# Altium PCB PCB1.PcbDoc (part 1 of 3)
Units mm, origin at the board's own origin, x right, y up, seen from the top; angles counter-clockwise.
Board outline 55.24 x 34.04 mm, 2 copper layers (Top Layer, Bottom Layer), stack 3.048 mm thick; 216 components, 8 nets, 576 pads, 0 vias.
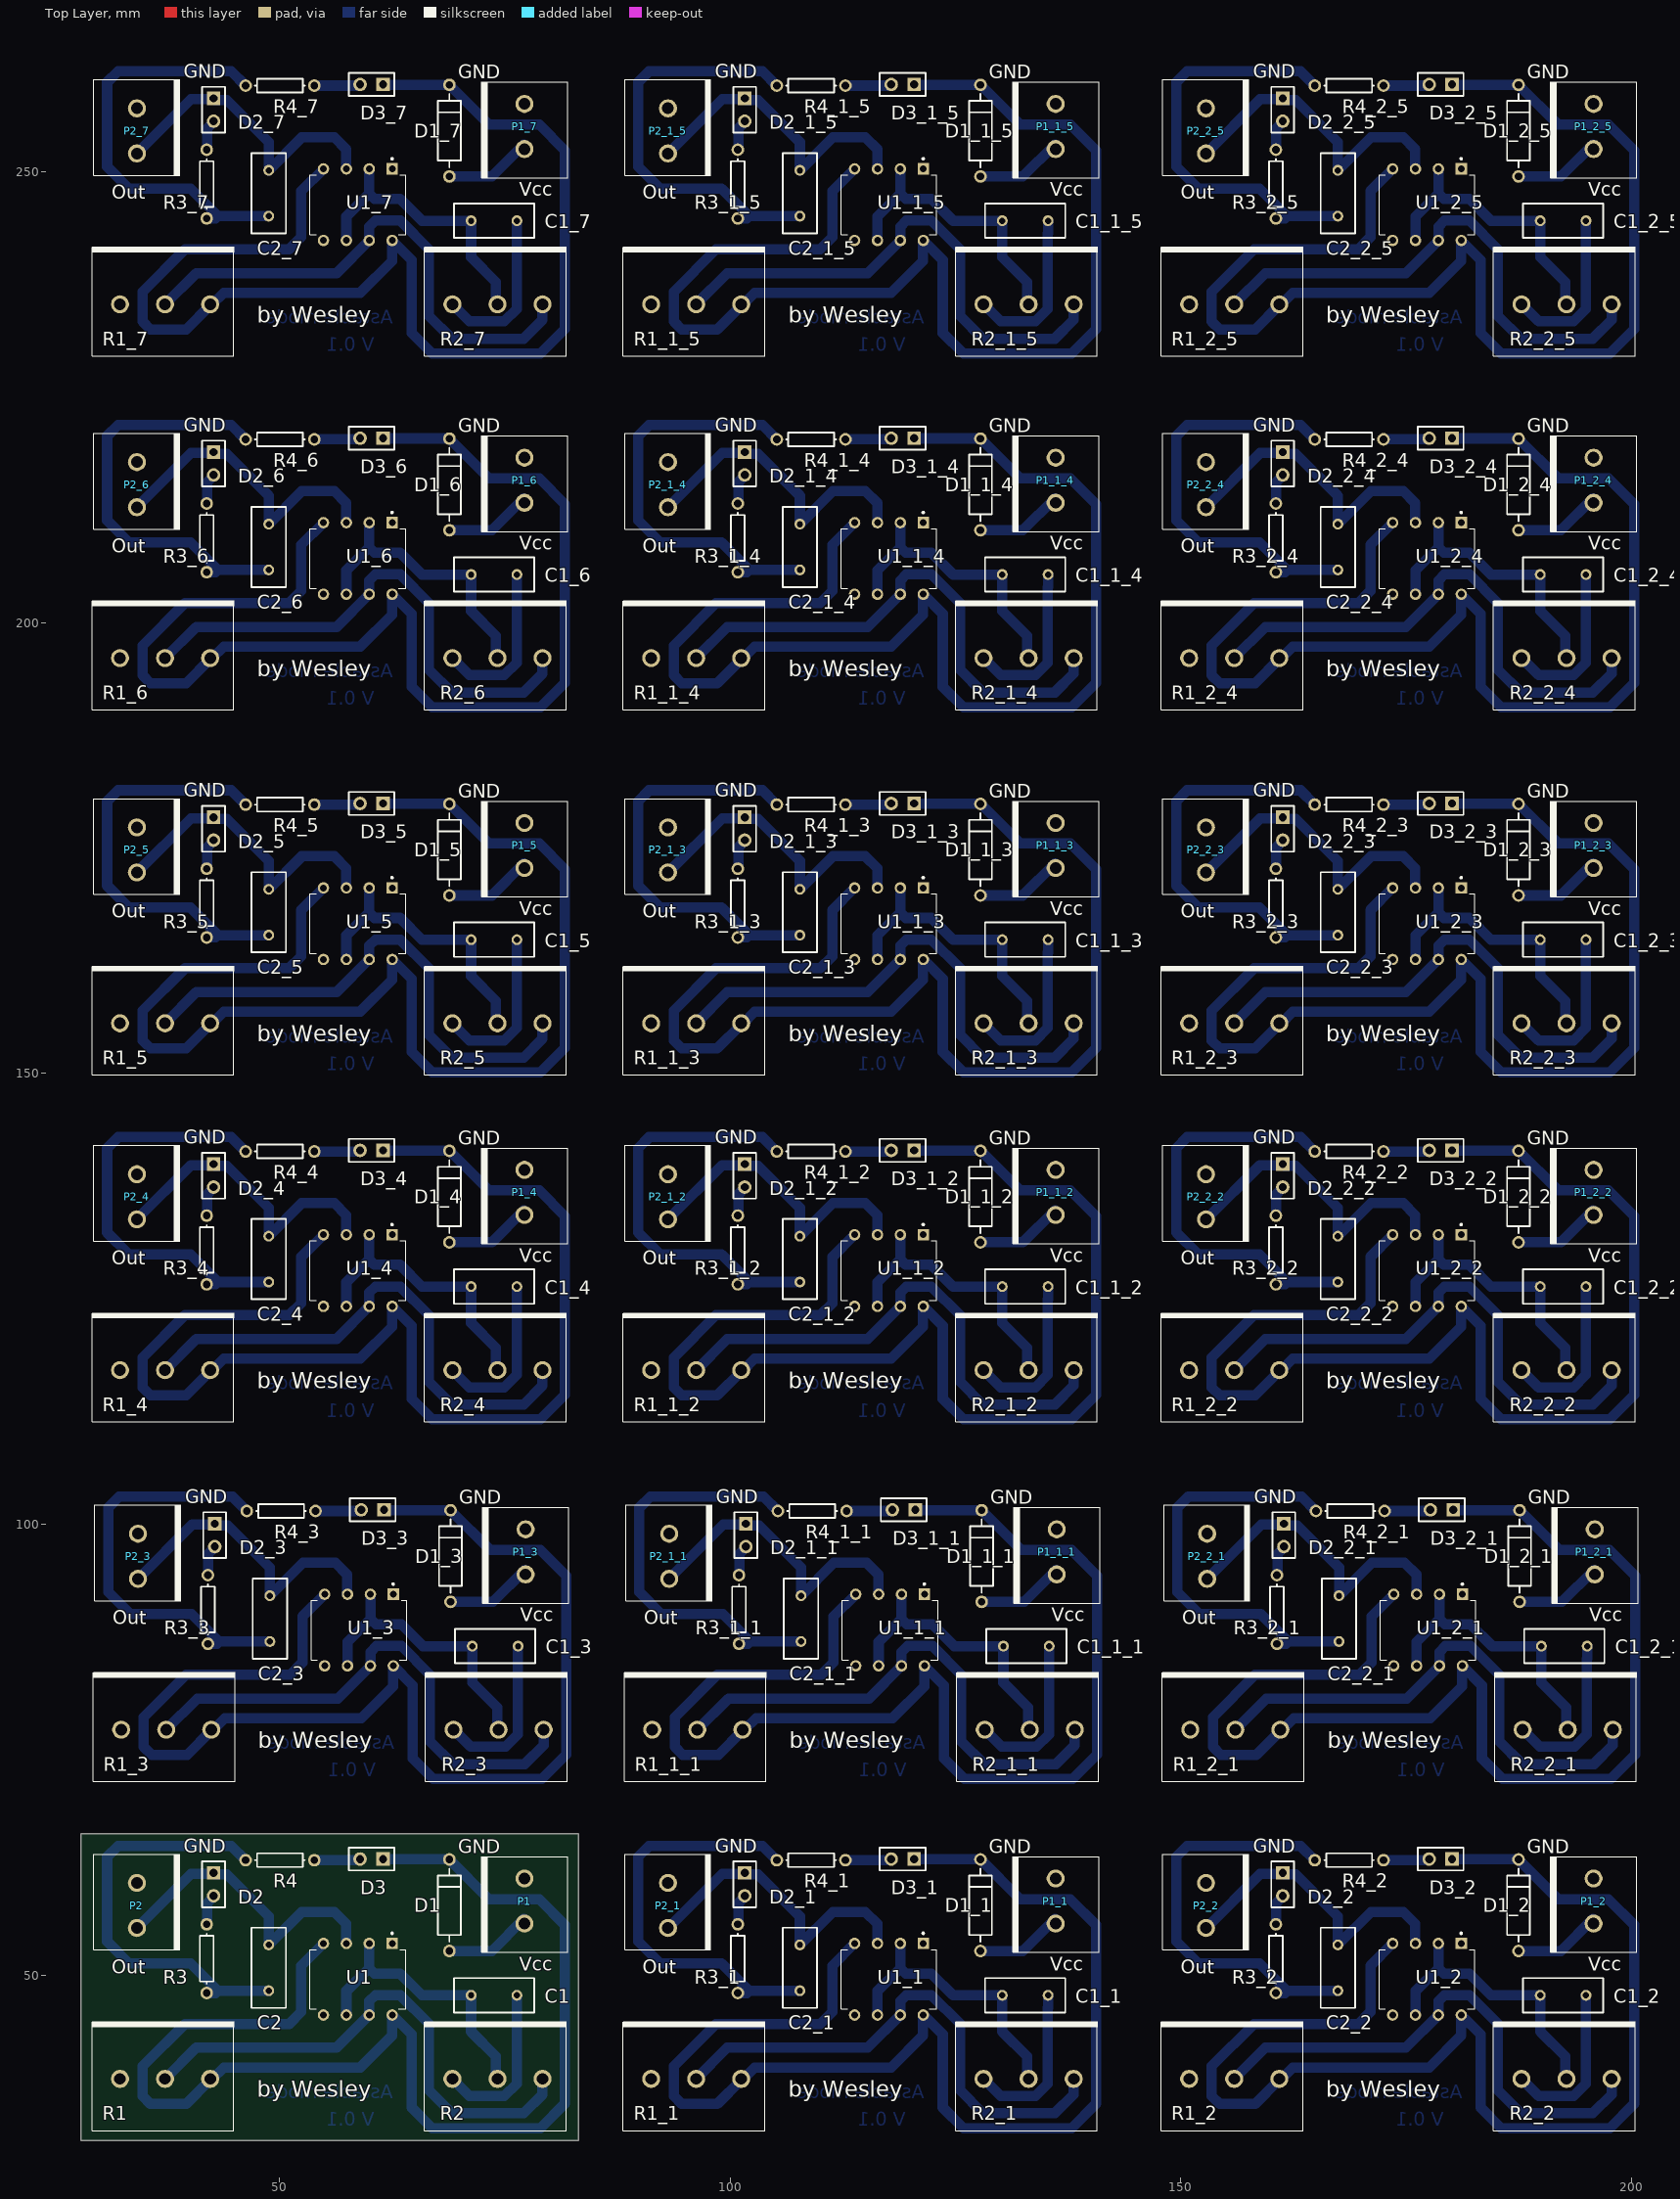
[diagram p0: Top Layer view]
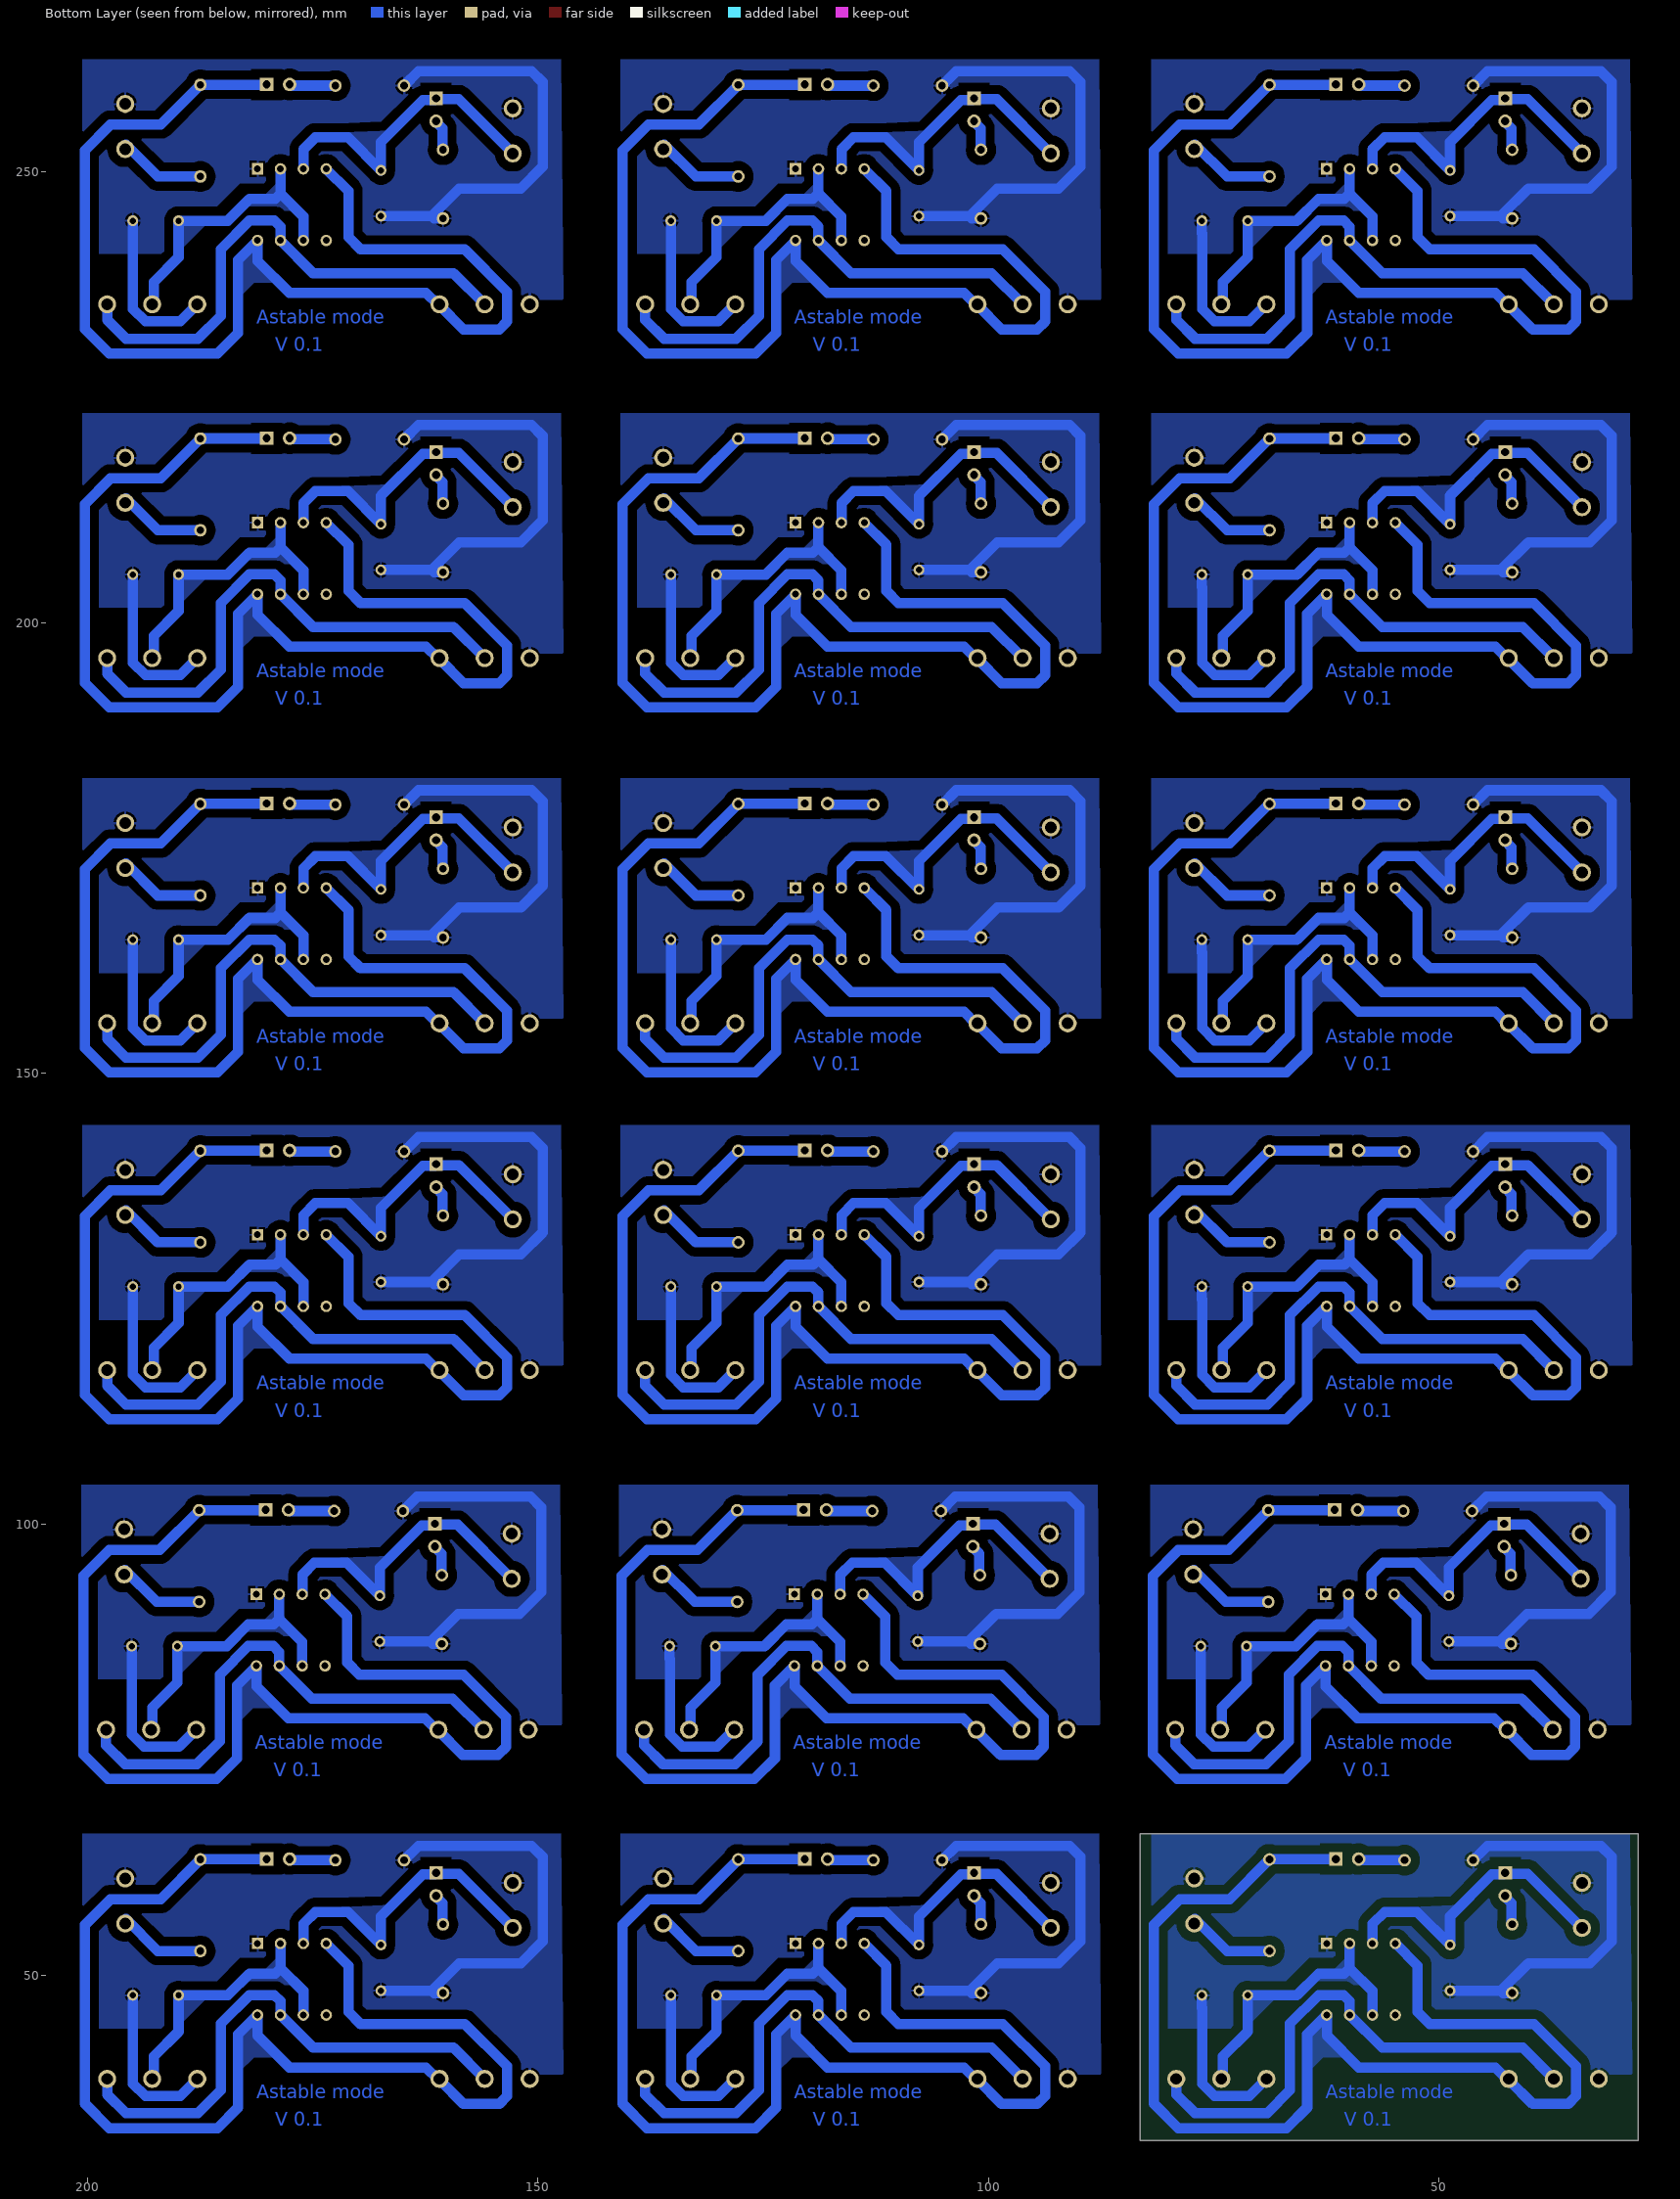
[diagram p1: Bottom Layer view, seen from below]

## Layer stack, top to bottom
Top Solder: solder mask 1.016, Solder Resist, Dk 3.5
Top Layer: signal copper 1.016
Dielectric 1: dielectric 1.016, FR-4, Dk 4.8
Bottom Layer: signal copper 1.016
Bottom Solder: solder mask 1.016, Solder Resist, Dk 3.5

## Board outline
27.94,31.623 83.185,31.623 83.185,65.659 27.94,65.659

## Design rules (kind name [scope] priority, off if disabled: settings)
Clearance [All] p1: gap=1.016 ignorepadtopadclearanceinfootprint=FALSE except(0.254: Arc-Arc Arc-Track Arc-THPad Arc-Hole Track-Track Track-THPad Track-Hole SMDPad-THPad SMDPad-Hole THPad-THPad THPad-Hole Via-Hole)
PolygonConnect [All] p1: connectstyle=Relief reliefconductorwidth=0.254 reliefentries=4 polygonreliefangle="90 Angle" airgapwidth=0.254
RoutingVias [All] p1: holewidth=0.711 width=1.27 viastyle="Through Hole" minholewidth=0.711 minwidth=1.27 maxholewidth=0.711 maxwidth=1.27
SolderMaskExpansion [All] p1: expansion=0.102
Width [All] p1: maxlimit=1.27 minlimit=1.016 preferedwidth=1.143 minimp=50.000000 maximp=50.000000 favimp=50.000000
30 further rules are at their usual default settings.

## Classes and differential pairs
component class Sheet1: C1 C2 D1 D2 D3 P1 P2 R1 R2 R3 R4 U1

## Components (designator, comment, footprint, x,y, rotation, side; value= is the part's Value field where it differs from the comment)
C1 "Cap" RAD-0.2 73.787,47.752 r180 top value=22uF
C1_1 "Cap" RAD-0.2 132.715,47.752 r180 top value=22uF (schematic designator C1)
C1_1_1 "Cap" RAD-0.2 132.842,86.487 r180 top value=22uF (schematic designator C1)
C1_1_2 "Cap" RAD-0.2 132.715,126.365 r180 top value=22uF (schematic designator C1)
C1_1_3 "Cap" RAD-0.2 132.715,164.846 r180 top value=22uF (schematic designator C1)
C1_1_4 "Cap" RAD-0.2 132.715,205.359 r180 top value=22uF (schematic designator C1)
C1_1_5 "Cap" RAD-0.2 132.715,244.602 r180 top value=22uF (schematic designator C1)
C1_2 "Cap" RAD-0.2 192.405,47.752 r180 top value=22uF (schematic designator C1)
C1_2_1 "Cap" RAD-0.2 192.532,86.487 r180 top value=22uF (schematic designator C1)
C1_2_2 "Cap" RAD-0.2 192.405,126.365 r180 top value=22uF (schematic designator C1)
C1_2_3 "Cap" RAD-0.2 192.405,164.846 r180 top value=22uF (schematic designator C1)
C1_2_4 "Cap" RAD-0.2 192.405,205.359 r180 top value=22uF (schematic designator C1)
C1_2_5 "Cap" RAD-0.2 192.405,244.602 r180 top value=22uF (schematic designator C1)
C1_3 "Cap" RAD-0.2 73.914,86.487 r180 top value=22uF (schematic designator C1)
C1_4 "Cap" RAD-0.2 73.787,126.365 r180 top value=22uF (schematic designator C1)
C1_5 "Cap" RAD-0.2 73.787,164.846 r180 top value=22uF (schematic designator C1)
C1_6 "Cap" RAD-0.2 73.787,205.359 r180 top value=22uF (schematic designator C1)
C1_7 "Cap" RAD-0.2 73.787,244.602 r180 top value=22uF (schematic designator C1)
C2 "Cap Pol2" RAD-0.2 48.794,50.8 r270 top value=100nF
C2_1 "Cap Pol2" RAD-0.2 107.722,50.8 r270 top value=100nF (schematic designator C2)
C2_1_1 "Cap Pol2" RAD-0.2 107.849,89.535 r270 top value=100nF (schematic designator C2)
C2_1_2 "Cap Pol2" RAD-0.2 107.722,129.413 r270 top value=100nF (schematic designator C2)
C2_1_3 "Cap Pol2" RAD-0.2 107.722,167.894 r270 top value=100nF (schematic designator C2)
C2_1_4 "Cap Pol2" RAD-0.2 107.722,208.407 r270 top value=100nF (schematic designator C2)
C2_1_5 "Cap Pol2" RAD-0.2 107.722,247.65 r270 top value=100nF (schematic designator C2)
C2_2 "Cap Pol2" RAD-0.2 167.412,50.8 r270 top value=100nF (schematic designator C2)
C2_2_1 "Cap Pol2" RAD-0.2 167.539,89.535 r270 top value=100nF (schematic designator C2)
C2_2_2 "Cap Pol2" RAD-0.2 167.412,129.413 r270 top value=100nF (schematic designator C2)
C2_2_3 "Cap Pol2" RAD-0.2 167.412,167.894 r270 top value=100nF (schematic designator C2)
C2_2_4 "Cap Pol2" RAD-0.2 167.412,208.407 r270 top value=100nF (schematic designator C2)
C2_2_5 "Cap Pol2" RAD-0.2 167.412,247.65 r270 top value=100nF (schematic designator C2)
C2_3 "Cap Pol2" RAD-0.2 48.921,89.535 r270 top value=100nF (schematic designator C2)
C2_4 "Cap Pol2" RAD-0.2 48.794,129.413 r270 top value=100nF (schematic designator C2)
C2_5 "Cap Pol2" RAD-0.2 48.794,167.894 r270 top value=100nF (schematic designator C2)
C2_6 "Cap Pol2" RAD-0.2 48.794,208.407 r270 top value=100nF (schematic designator C2)
C2_7 "Cap Pol2" RAD-0.2 48.794,247.65 r270 top value=100nF (schematic designator C2)
D1 "Diode" DIODE-0.4 68.834,57.741 r90 top
D1_1 "Diode" DIODE-0.4 127.762,57.741 r90 top (schematic designator D1)
D1_1_1 "Diode" DIODE-0.4 127.889,96.476 r90 top (schematic designator D1)
D1_1_2 "Diode" DIODE-0.4 127.762,136.354 r90 top (schematic designator D1)
D1_1_3 "Diode" DIODE-0.4 127.762,174.835 r90 top (schematic designator D1)
D1_1_4 "Diode" DIODE-0.4 127.762,215.348 r90 top (schematic designator D1)
D1_1_5 "Diode" DIODE-0.4 127.762,254.591 r90 top (schematic designator D1)
D1_2 "Diode" DIODE-0.4 187.452,57.741 r90 top (schematic designator D1)
D1_2_1 "Diode" DIODE-0.4 187.579,96.476 r90 top (schematic designator D1)
D1_2_2 "Diode" DIODE-0.4 187.452,136.354 r90 top (schematic designator D1)
D1_2_3 "Diode" DIODE-0.4 187.452,174.835 r90 top (schematic designator D1)
D1_2_4 "Diode" DIODE-0.4 187.452,215.348 r90 top (schematic designator D1)
D1_2_5 "Diode" DIODE-0.4 187.452,254.591 r90 top (schematic designator D1)
D1_3 "Diode" DIODE-0.4 68.961,96.476 r90 top (schematic designator D1)
D1_4 "Diode" DIODE-0.4 68.834,136.354 r90 top (schematic designator D1)
D1_5 "Diode" DIODE-0.4 68.834,174.835 r90 top (schematic designator D1)
D1_6 "Diode" DIODE-0.4 68.834,215.348 r90 top (schematic designator D1)
D1_7 "Diode" DIODE-0.4 68.834,254.591 r90 top (schematic designator D1)
D2 "LED0" HDR1X2 42.672,61.331 r270 top
D2_1 "LED0" HDR1X2 101.6,61.331 r270 top (schematic designator D2)
D2_1_1 "LED0" HDR1X2 101.727,100.066 r270 top (schematic designator D2)
D2_1_2 "LED0" HDR1X2 101.6,139.944 r270 top (schematic designator D2)
D2_1_3 "LED0" HDR1X2 101.6,178.425 r270 top (schematic designator D2)
D2_1_4 "LED0" HDR1X2 101.6,218.938 r270 top (schematic designator D2)
D2_1_5 "LED0" HDR1X2 101.6,258.181 r270 top (schematic designator D2)
D2_2 "LED0" HDR1X2 161.29,61.331 r270 top (schematic designator D2)
D2_2_1 "LED0" HDR1X2 161.417,100.066 r270 top (schematic designator D2)
D2_2_2 "LED0" HDR1X2 161.29,139.944 r270 top (schematic designator D2)
D2_2_3 "LED0" HDR1X2 161.29,178.425 r270 top (schematic designator D2)
D2_2_4 "LED0" HDR1X2 161.29,218.938 r270 top (schematic designator D2)
D2_2_5 "LED0" HDR1X2 161.29,258.181 r270 top (schematic designator D2)
D2_3 "LED0" HDR1X2 42.799,100.066 r270 top (schematic designator D2)
D2_4 "LED0" HDR1X2 42.672,139.944 r270 top (schematic designator D2)
D2_5 "LED0" HDR1X2 42.672,178.425 r270 top (schematic designator D2)
D2_6 "LED0" HDR1X2 42.672,218.938 r270 top (schematic designator D2)
D2_7 "LED0" HDR1X2 42.672,258.181 r270 top (schematic designator D2)
D3 "LED0" HDR1X2 61.468,62.865 r180 top
D3_1 "LED0" HDR1X2 120.396,62.865 r180 top (schematic designator D3)
D3_1_1 "LED0" HDR1X2 120.523,101.6 r180 top (schematic designator D3)
D3_1_2 "LED0" HDR1X2 120.396,141.478 r180 top (schematic designator D3)
D3_1_3 "LED0" HDR1X2 120.396,179.959 r180 top (schematic designator D3)
D3_1_4 "LED0" HDR1X2 120.396,220.472 r180 top (schematic designator D3)
D3_1_5 "LED0" HDR1X2 120.396,259.715 r180 top (schematic designator D3)
D3_2 "LED0" HDR1X2 180.086,62.865 r180 top (schematic designator D3)
D3_2_1 "LED0" HDR1X2 180.213,101.6 r180 top (schematic designator D3)
D3_2_2 "LED0" HDR1X2 180.086,141.478 r180 top (schematic designator D3)
D3_2_3 "LED0" HDR1X2 180.086,179.959 r180 top (schematic designator D3)
D3_2_4 "LED0" HDR1X2 180.086,220.472 r180 top (schematic designator D3)
D3_2_5 "LED0" HDR1X2 180.086,259.715 r180 top (schematic designator D3)
D3_3 "LED0" HDR1X2 61.595,101.6 r180 top (schematic designator D3)
D3_4 "LED0" HDR1X2 61.468,141.478 r180 top (schematic designator D3)
D3_5 "LED0" HDR1X2 61.468,179.959 r180 top (schematic designator D3)
D3_6 "LED0" HDR1X2 61.468,220.472 r180 top (schematic designator D3)
D3_7 "LED0" HDR1X2 61.468,259.715 r180 top (schematic designator D3)
P1 "Header 2" CN_KRE_2 77.166,58.206 r270 top
P1_1 "Header 2" CN_KRE_2 136.094,58.206 r270 top (schematic designator P1)
P1_1_1 "Header 2" CN_KRE_2 136.221,96.941 r270 top (schematic designator P1)
P1_1_2 "Header 2" CN_KRE_2 136.094,136.819 r270 top (schematic designator P1)
P1_1_3 "Header 2" CN_KRE_2 136.094,175.3 r270 top (schematic designator P1)
P1_1_4 "Header 2" CN_KRE_2 136.094,215.813 r270 top (schematic designator P1)
P1_1_5 "Header 2" CN_KRE_2 136.094,255.056 r270 top (schematic designator P1)
P1_2 "Header 2" CN_KRE_2 195.784,58.206 r270 top (schematic designator P1)
P1_2_1 "Header 2" CN_KRE_2 195.911,96.941 r270 top (schematic designator P1)
P1_2_2 "Header 2" CN_KRE_2 195.784,136.819 r270 top (schematic designator P1)
P1_2_3 "Header 2" CN_KRE_2 195.784,175.3 r270 top (schematic designator P1)
P1_2_4 "Header 2" CN_KRE_2 195.784,215.813 r270 top (schematic designator P1)
P1_2_5 "Header 2" CN_KRE_2 195.784,255.056 r270 top (schematic designator P1)
P1_3 "Header 2" CN_KRE_2 77.293,96.941 r270 top (schematic designator P1)
P1_4 "Header 2" CN_KRE_2 77.166,136.819 r270 top (schematic designator P1)
P1_5 "Header 2" CN_KRE_2 77.166,175.3 r270 top (schematic designator P1)
P1_6 "Header 2" CN_KRE_2 77.166,215.813 r270 top (schematic designator P1)
P1_7 "Header 2" CN_KRE_2 77.166,255.056 r270 top (schematic designator P1)
P2 "Header 2" CN_KRE_2 34.163,57.716 r90 top
P2_1 "Header 2" CN_KRE_2 93.091,57.716 r90 top (schematic designator P2)
P2_1_1 "Header 2" CN_KRE_2 93.218,96.451 r90 top (schematic designator P2)
P2_1_2 "Header 2" CN_KRE_2 93.091,136.329 r90 top (schematic designator P2)
P2_1_3 "Header 2" CN_KRE_2 93.091,174.81 r90 top (schematic designator P2)
P2_1_4 "Header 2" CN_KRE_2 93.091,215.323 r90 top (schematic designator P2)
P2_1_5 "Header 2" CN_KRE_2 93.091,254.566 r90 top (schematic designator P2)
P2_2 "Header 2" CN_KRE_2 152.781,57.716 r90 top (schematic designator P2)
P2_2_1 "Header 2" CN_KRE_2 152.908,96.451 r90 top (schematic designator P2)
P2_2_2 "Header 2" CN_KRE_2 152.781,136.329 r90 top (schematic designator P2)
P2_2_3 "Header 2" CN_KRE_2 152.781,174.81 r90 top (schematic designator P2)
P2_2_4 "Header 2" CN_KRE_2 152.781,215.323 r90 top (schematic designator P2)
P2_2_5 "Header 2" CN_KRE_2 152.781,254.566 r90 top (schematic designator P2)
P2_3 "Header 2" CN_KRE_2 34.29,96.451 r90 top (schematic designator P2)
P2_4 "Header 2" CN_KRE_2 34.163,136.329 r90 top (schematic designator P2)
P2_5 "Header 2" CN_KRE_2 34.163,174.81 r90 top (schematic designator P2)
P2_6 "Header 2" CN_KRE_2 34.163,215.323 r90 top (schematic designator P2)
P2_7 "Header 2" CN_KRE_2 34.163,254.566 r90 top (schematic designator P2)
R1 "Res Adj1" CN_KRE_3 37.291,38.481 r180 top value=50k
R1_1 "Res Adj1" CN_KRE_3 96.219,38.481 r180 top value=50k (schematic designator R1)
R1_1_1 "Res Adj1" CN_KRE_3 96.346,77.216 r180 top value=50k (schematic designator R1)
R1_1_2 "Res Adj1" CN_KRE_3 96.219,117.094 r180 top value=50k (schematic designator R1)
R1_1_3 "Res Adj1" CN_KRE_3 96.219,155.575 r180 top value=50k (schematic designator R1)
R1_1_4 "Res Adj1" CN_KRE_3 96.219,196.088 r180 top value=50k (schematic designator R1)
R1_1_5 "Res Adj1" CN_KRE_3 96.219,235.331 r180 top value=50k (schematic designator R1)
R1_2 "Res Adj1" CN_KRE_3 155.909,38.481 r180 top value=50k (schematic designator R1)
R1_2_1 "Res Adj1" CN_KRE_3 156.036,77.216 r180 top value=50k (schematic designator R1)
R1_2_2 "Res Adj1" CN_KRE_3 155.909,117.094 r180 top value=50k (schematic designator R1)
R1_2_3 "Res Adj1" CN_KRE_3 155.909,155.575 r180 top value=50k (schematic designator R1)
R1_2_4 "Res Adj1" CN_KRE_3 155.909,196.088 r180 top value=50k (schematic designator R1)
R1_2_5 "Res Adj1" CN_KRE_3 155.909,235.331 r180 top value=50k (schematic designator R1)
R1_3 "Res Adj1" CN_KRE_3 37.418,77.216 r180 top value=50k (schematic designator R1)
R1_4 "Res Adj1" CN_KRE_3 37.291,117.094 r180 top value=50k (schematic designator R1)
R1_5 "Res Adj1" CN_KRE_3 37.291,155.575 r180 top value=50k (schematic designator R1)
R1_6 "Res Adj1" CN_KRE_3 37.291,196.088 r180 top value=50k (schematic designator R1)
R1_7 "Res Adj1" CN_KRE_3 37.291,235.331 r180 top value=50k (schematic designator R1)
R2 "Res Adj1" CN_KRE_3 74.168,38.481 r180 top value=50k
R2_1 "Res Adj1" CN_KRE_3 133.096,38.481 r180 top value=50k (schematic designator R2)
R2_1_1 "Res Adj1" CN_KRE_3 133.223,77.216 r180 top value=50k (schematic designator R2)
R2_1_2 "Res Adj1" CN_KRE_3 133.096,117.094 r180 top value=50k (schematic designator R2)
R2_1_3 "Res Adj1" CN_KRE_3 133.096,155.575 r180 top value=50k (schematic designator R2)
R2_1_4 "Res Adj1" CN_KRE_3 133.096,196.088 r180 top value=50k (schematic designator R2)
R2_1_5 "Res Adj1" CN_KRE_3 133.096,235.331 r180 top value=50k (schematic designator R2)
R2_2 "Res Adj1" CN_KRE_3 192.786,38.481 r180 top value=50k (schematic designator R2)
R2_2_1 "Res Adj1" CN_KRE_3 192.913,77.216 r180 top value=50k (schematic designator R2)
R2_2_2 "Res Adj1" CN_KRE_3 192.786,117.094 r180 top value=50k (schematic designator R2)
R2_2_3 "Res Adj1" CN_KRE_3 192.786,155.575 r180 top value=50k (schematic designator R2)
R2_2_4 "Res Adj1" CN_KRE_3 192.786,196.088 r180 top value=50k (schematic designator R2)
R2_2_5 "Res Adj1" CN_KRE_3 192.786,235.331 r180 top value=50k (schematic designator R2)
R2_3 "Res Adj1" CN_KRE_3 74.295,77.216 r180 top value=50k (schematic designator R2)
R2_4 "Res Adj1" CN_KRE_3 74.168,117.094 r180 top value=50k (schematic designator R2)
R2_5 "Res Adj1" CN_KRE_3 74.168,155.575 r180 top value=50k (schematic designator R2)
R2_6 "Res Adj1" CN_KRE_3 74.168,196.088 r180 top value=50k (schematic designator R2)
R2_7 "Res Adj1" CN_KRE_3 74.168,235.331 r180 top value=50k (schematic designator R2)
R3 "Res1" AXIAL-0.3 41.91,51.816 r90 top value=220
R3_1 "Res1" AXIAL-0.3 100.838,51.816 r90 top value=220 (schematic designator R3)
R3_1_1 "Res1" AXIAL-0.3 100.965,90.551 r90 top value=220 (schematic designator R3)
R3_1_2 "Res1" AXIAL-0.3 100.838,130.429 r90 top value=220 (schematic designator R3)
R3_1_3 "Res1" AXIAL-0.3 100.838,168.91 r90 top value=220 (schematic designator R3)
R3_1_4 "Res1" AXIAL-0.3 100.838,209.423 r90 top value=220 (schematic designator R3)
R3_1_5 "Res1" AXIAL-0.3 100.838,248.666 r90 top value=220 (schematic designator R3)
R3_2 "Res1" AXIAL-0.3 160.528,51.816 r90 top value=220 (schematic designator R3)
R3_2_1 "Res1" AXIAL-0.3 160.655,90.551 r90 top value=220 (schematic designator R3)
R3_2_2 "Res1" AXIAL-0.3 160.528,130.429 r90 top value=220 (schematic designator R3)
R3_2_3 "Res1" AXIAL-0.3 160.528,168.91 r90 top value=220 (schematic designator R3)
R3_2_4 "Res1" AXIAL-0.3 160.528,209.423 r90 top value=220 (schematic designator R3)
R3_2_5 "Res1" AXIAL-0.3 160.528,248.666 r90 top value=220 (schematic designator R3)
R3_3 "Res1" AXIAL-0.3 42.037,90.551 r90 top value=220 (schematic designator R3)
R3_4 "Res1" AXIAL-0.3 41.91,130.429 r90 top value=220 (schematic designator R3)
R3_5 "Res1" AXIAL-0.3 41.91,168.91 r90 top value=220 (schematic designator R3)
R3_6 "Res1" AXIAL-0.3 41.91,209.423 r90 top value=220 (schematic designator R3)
R3_7 "Res1" AXIAL-0.3 41.91,248.666 r90 top value=220 (schematic designator R3)
R4 "Res1" AXIAL-0.3 50.038,62.738 r0 top value=220
R4_1 "Res1" AXIAL-0.3 108.966,62.738 r0 top value=220 (schematic designator R4)
R4_1_1 "Res1" AXIAL-0.3 109.093,101.473 r0 top value=220 (schematic designator R4)
R4_1_2 "Res1" AXIAL-0.3 108.966,141.351 r0 top value=220 (schematic designator R4)
R4_1_3 "Res1" AXIAL-0.3 108.966,179.832 r0 top value=220 (schematic designator R4)
R4_1_4 "Res1" AXIAL-0.3 108.966,220.345 r0 top value=220 (schematic designator R4)
R4_1_5 "Res1" AXIAL-0.3 108.966,259.588 r0 top value=220 (schematic designator R4)
R4_2 "Res1" AXIAL-0.3 168.656,62.738 r0 top value=220 (schematic designator R4)
R4_2_1 "Res1" AXIAL-0.3 168.783,101.473 r0 top value=220 (schematic designator R4)
R4_2_2 "Res1" AXIAL-0.3 168.656,141.351 r0 top value=220 (schematic designator R4)
R4_2_3 "Res1" AXIAL-0.3 168.656,179.832 r0 top value=220 (schematic designator R4)
R4_2_4 "Res1" AXIAL-0.3 168.656,220.345 r0 top value=220 (schematic designator R4)
R4_2_5 "Res1" AXIAL-0.3 168.656,259.588 r0 top value=220 (schematic designator R4)
R4_3 "Res1" AXIAL-0.3 50.165,101.473 r0 top value=220 (schematic designator R4)
R4_4 "Res1" AXIAL-0.3 50.038,141.351 r0 top value=220 (schematic designator R4)
R4_5 "Res1" AXIAL-0.3 50.038,179.832 r0 top value=220 (schematic designator R4)
R4_6 "Res1" AXIAL-0.3 50.038,220.345 r0 top value=220 (schematic designator R4)
R4_7 "Res1" AXIAL-0.3 50.038,259.588 r0 top value=220 (schematic designator R4)
U1 "NE555" *DIP794W45P254L1060H508Q8 58.674,49.53 r270 top
U1_1 "NE555" *DIP794W45P254L1060H508Q8 117.602,49.53 r270 top (schematic designator U1)
U1_1_1 "NE555" *DIP794W45P254L1060H508Q8 117.729,88.265 r270 top (schematic designator U1)
U1_1_2 "NE555" *DIP794W45P254L1060H508Q8 117.602,128.143 r270 top (schematic designator U1)
U1_1_3 "NE555" *DIP794W45P254L1060H508Q8 117.602,166.624 r270 top (schematic designator U1)
U1_1_4 "NE555" *DIP794W45P254L1060H508Q8 117.602,207.137 r270 top (schematic designator U1)
U1_1_5 "NE555" *DIP794W45P254L1060H508Q8 117.602,246.38 r270 top (schematic designator U1)
U1_2 "NE555" *DIP794W45P254L1060H508Q8 177.292,49.53 r270 top (schematic designator U1)
U1_2_1 "NE555" *DIP794W45P254L1060H508Q8 177.419,88.265 r270 top (schematic designator U1)
U1_2_2 "NE555" *DIP794W45P254L1060H508Q8 177.292,128.143 r270 top (schematic designator U1)
U1_2_3 "NE555" *DIP794W45P254L1060H508Q8 177.292,166.624 r270 top (schematic designator U1)
U1_2_4 "NE555" *DIP794W45P254L1060H508Q8 177.292,207.137 r270 top (schematic designator U1)
U1_2_5 "NE555" *DIP794W45P254L1060H508Q8 177.292,246.38 r270 top (schematic designator U1)
U1_3 "NE555" *DIP794W45P254L1060H508Q8 58.801,88.265 r270 top (schematic designator U1)
U1_4 "NE555" *DIP794W45P254L1060H508Q8 58.674,128.143 r270 top (schematic designator U1)
U1_5 "NE555" *DIP794W45P254L1060H508Q8 58.674,166.624 r270 top (schematic designator U1)
U1_6 "NE555" *DIP794W45P254L1060H508Q8 58.674,207.137 r270 top (schematic designator U1)
U1_7 "NE555" *DIP794W45P254L1060H508Q8 58.674,246.38 r270 top (schematic designator U1)

## Footprints (in the part's own frame and the unit in brackets; to place one, negate y for a bottom-side part, rotate by r counter-clockwise, add the part's x,y. Pads: shape width x height; smd on the part's side, far side on the other; paste and mask are expansions set on the pad)
*DIP794W45P254L1060H508Q8 [mm]
  rect 1.268x1.268 hole 0.76: 1(-3.97,3.81)
  round 1.268 hole 0.76: 2(-3.97,1.27) 3(-3.97,-1.27) 4(-3.97,-3.81) 5(3.97,-3.81) 6(3.97,-1.27) 7(3.97,1.27) 8(3.97,3.81)
  silkscreen extent -5.2,-5.3 3.3,5.3
AXIAL-0.3 [mm] "Axial Device, Thru-Hole; 2 Leads; 0.3 in Pin Spacing"
  round 1.4 hole 0.85: 1(-3.81,0) 2(3.81,0)
  silkscreen extent -2.77,-0.76 2.77,0.76
CN_KRE_2 [mm]
  round 2 hole 1.3: 1(-2.5,0) 2(2.5,0)
  silkscreen extent -4.93,-4.75 5.69,4.8, body extent -4.93,-4.7 5.64,4.8, height 15
CN_KRE_3 [mm]
  round 2 hole 1.3: 1(-5,0) 2(0,0) 3(5,0)
  silkscreen extent -7.67,-6.38 8.1,5.74, body extent -7.53,-5.61 8.04,5.59, height 18
DIODE-0.4 [mm] "Diode, Thru-Hole; 2 Leads; 0.4 in Pin Spacing"
  round 1.4 hole 0.85: 1(-5.08,0) 2(5.08,0)
  silkscreen extent -4.06,-1.27 4.06,1.27
HDR1X2 [mm] "Connector; Header; 2 Position"
  rect 1.5x1.5 hole 0.9: 1(0,0)
  round 1.5 hole 0.9: 2(2.54,0)
  silkscreen extent -1.27,-1.27 3.81,1.27
RAD-0.2 [mm] "Radial Cap, Thru-Hole; 2 Leads; 0.2 in Pin Spacing"
  round 1.2 hole 0.7: 1(-2.54,0) 2(2.54,0)
  silkscreen extent -4.44,-1.91 4.44,1.91

## Part data
C1 C1_1 C1_1_1 C1_1_2 C1_1_3 C1_1_4 C1_1_5 C1_2 C1_2_1 C1_2_2 C1_2_3 C1_2_4 C1_2_5 C1_3 C1_4 C1_5 C1_6 C1_7: "Capacitor", LatestRevisionDate=17-Jul-2002, LatestRevisionNote="Re-released for DXP Platform.", PackageDescription="Radial Cap, Thru-Hole; 2 Leads; 0.3 in Pin Spacing", PackageReference=RAD-0.3, Published=8-Jun-2000, Publisher="Altium Limited"
C2 C2_1 C2_1_1 C2_1_2 C2_1_3 C2_1_4 C2_1_5 C2_2 C2_2_1 C2_2_2 C2_2_3 C2_2_4 C2_2_5 C2_3 C2_4 C2_5 C2_6 C2_7: "Polarized Capacitor (Axial)", LatestRevisionDate=17-Jul-2002, LatestRevisionNote="Re-released for DXP Platform.", PackageDescription="Polarized Capacitor; 2 Leads", PackageReference=POLAR0.8, Published=8-Jun-2000, Publisher="Altium Limited"
D1 D1_1 D1_1_1 D1_1_2 D1_1_3 D1_1_4 D1_1_5 D1_2 D1_2_1 D1_2_2 D1_2_3 D1_2_4 D1_2_5 D1_3 D1_4 D1_5 D1_6 D1_7: "Default Diode", Code_JEDEC=DO-214-AB, LatestRevisionDate=17-Jul-2002, LatestRevisionNote="Re-released for DXP Platform.", PackageDescription="DO-214-AB/SMC; 2 C-Bend Leads; Body 7.9 x 5.9 mm, inc. leads (LxW)", PackageReference=SMC, PackageVersion=Sep-1996, Published=8-Jun-2000, Publisher="Altium Limited"
D2 D2_1 D2_1_1 D2_1_2 D2_1_3 D2_1_4 D2_1_5 D2_2 D2_2_1 D2_2_2 D2_2_3 D2_2_4 D2_2_5 D2_3 D2_4 D2_5 D2_6 D2_7 D3 D3_1 D3_1_1 D3_1_2 D3_1_3 D3_1_4 D3_1_5 D3_2 D3_2_1 D3_2_2 D3_2_3 D3_2_4 D3_2_5 D3_3 D3_4 D3_5 D3_6 D3_7: "Typical INFRARED GaAs LED", LatestRevisionDate=08-Jul-2005, LatestRevisionNote="Mech Layer 1 removed.", PackageDescription="LED; 2 Leads", PackageReference=LED-0, Published=8-Jun-2000, Publisher="Altium Limited"
P1 P1_1 P1_1_1 P1_1_2 P1_1_3 P1_1_4 P1_1_5 P1_2 P1_2_1 P1_2_2 P1_2_3 P1_2_4 P1_2_5 P1_3 P1_4 P1_5 P1_6 P1_7 P2 P2_1 P2_1_1 P2_1_2 P2_1_3 P2_1_4 P2_1_5 P2_2 P2_2_1 P2_2_2 P2_2_3 P2_2_4 P2_2_5 P2_3 P2_4 P2_5 P2_6 P2_7: "Header, 2-Pin", LatestRevisionDate=17-Jul-2002, LatestRevisionNote="Re-released for DXP Platform.", Publisher="Altium Limited"
R1 R1_1 R1_1_1 R1_1_2 R1_1_3 R1_1_4 R1_1_5 R1_2 R1_2_1 R1_2_2 R1_2_3 R1_2_4 R1_2_5 R1_3 R1_4 R1_5 R1_6 R1_7 R2 R2_1 R2_1_1 R2_1_2 R2_1_3 R2_1_4 R2_1_5 R2_2 R2_2_1 R2_2_2 R2_2_3 R2_2_4 R2_2_5 R2_3 R2_4 R2_5 R2_6 R2_7: "Variable Resistor", LatestRevisionDate=17-Jul-2002, LatestRevisionNote="Re-released for DXP Platform.", PackageDescription="Axial Device, Thru-Hole; 2 Leads; 0.7 in Pin Spacing", PackageReference=AXIAL-0.7, Published=8-Jun-2000, Publisher="Altium Limited", Set Position=0.5
R3 R3_1 R3_1_1 R3_1_2 R3_1_3 R3_1_4 R3_1_5 R3_2 R3_2_1 R3_2_2 R3_2_3 R3_2_4 R3_2_5 R3_3 R3_4 R3_5 R3_6 R3_7 R4 R4_1 R4_1_1 R4_1_2 R4_1_3 R4_1_4 R4_1_5 R4_2 R4_2_1 R4_2_2 R4_2_3 R4_2_4 R4_2_5 R4_3 R4_4 R4_5 R4_6 R4_7: "Resistor", LatestRevisionDate=17-Jul-2002, LatestRevisionNote="Re-released for DXP Platform.", PackageDescription="Axial Device, Thru-Hole; 2 Leads; 0.3 in Pin Spacing", PackageReference=AXIAL-0.3, Published=8-Jun-2000, Publisher="Altium Limited"
U1 U1_1 U1_1_1 U1_1_2 U1_1_3 U1_1_4 U1_1_5 U1_2 U1_2_1 U1_2_2 U1_2_3 U1_2_4 U1_2_5 U1_3 U1_4 U1_5 U1_6 U1_7: Package="SOIC-8 Conrad", Digi-Key_Part_Number=296-6501-1-ND, Digi-Key_Purchase_URL=https://www.digikey.com.br/product-detail/en/texas-instruments/NE555DR/296-6501-1-ND/372490?utm_source=snapeda&utm_medium=aggregator&utm_campaign=symbol, MF="Texas Instruments", MP=NE555, SnapEDA_Link=https://www.snapeda.com/parts/NE555/Texas%20Instruments/view-part/?ref=snap

## Nets (pads, with @x,y where several pads share a name; then routed paths per layer and width w, separated by ;. In a path a pad name is that pad's centre, name@x,y a point inside that pad or via, vN(x,y) a via of type N, cw(c..) or ccw(c..) an arc to the next point about the centre after c; other vN are vias at no path point)
GND: C1.1 C2.2 P1.1 P2.2 R1.3 R2.3 R3.1 R4.1 U1.1 | length 65.8
  Bottom Layer w1.143: R3.1@41.91,48.006 42.901,48.006 43.155,48.26 ; R4.1@46.228,62.738 44.635,64.331 32.073,64.331 30.861,63.119 30.861,53.746 33.299,51.308 40.107,51.308 43.155,48.26 ; C2.2@48.794,48.26 43.155,48.26 ; R2.3@69.168,38.481 71.068,36.581 74.93,36.581 76.306,37.957 76.306,46.334 76.316,46.344 76.316,47.741 C1.1@76.327,47.752
NetC1_2: C1.2 R2.2 U1.2 U1.6 | length 32
  Bottom Layer w1.143: U1.6@57.404,45.56 57.404,48.225 59.944,50.765 ; U1.2@59.944,53.5 59.944,50.765 ; R2.2@74.168,38.481 74.004,38.645 74.004,40.964 71.247,43.721 C1.2@71.247,47.752 65.786,47.752 63.373,50.165 60.544,50.165 59.944,50.765
NetC2_1: C2.1 D2.1 P2.1 U1.3 | length 35.2
  Bottom Layer w1.143: P2.1@34.163,55.216 40.179,61.232 42.573,61.232 D2.1@42.672,61.331 42.851,61.153 44.13,61.153 48.794,56.489 C2.1@48.794,53.34 52.461,57.007 56.053,57.007 57.38,55.68 57.38,53.524 U1.3@57.404,53.5
NetD1_1: D1.1 P1.2 | length 9.7
  Bottom Layer w1.143: D1.1@68.834,52.661 73.536,52.661 P1.2@77.089,56.214
NetD2_2: D2.2 R3.2 | length 3.5
  Bottom Layer w1.143: R3.2@41.91,55.626 41.959,55.675 41.959,57.982 42.672,58.695 D2.2@42.672,58.791
NetD3_2: D3.2 R4.2 | length 5.1
  Bottom Layer w1.143: R4.2@53.848,62.738 58.704,62.738 58.831,62.865 D3.2@58.928,62.865
NetR1_2: R1.2 R2.1 U1.7 | length 59
  Bottom Layer w1.143: R1.2@37.291,38.481 40.745,41.935 56.319,41.935 U1.7@59.944,45.56 59.944,47.094 60.614,47.763 63.378,47.763 66.548,44.593 66.548,37.211 69.088,34.671 77.075,34.671 79.168,36.764 R2.1@79.168,38.481
VCC: D1.2 D3.1 R1.1 U1.4 U1.8 | length 138.8
  Bottom Layer w1.143: U1.4@54.864,53.5 52.397,51.033 52.397,45.92 51.054,44.577 39.497,44.577 34.798,39.878 34.798,36.576 35.687,35.687 39.617,35.687 42.291,38.361 R1.1@42.291,38.481 42.523,38.481 43.793,39.751 58.928,39.751 62.46,43.283 62.46,45.536 U1.8@62.484,45.56 64.643,43.401 64.643,35.306 66.929,33.02 78.943,33.02 81.661,35.738 81.661,55.555 78.796,58.42 73.235,58.42 D1.2@68.834,62.821 68.812,62.843 61.49,62.843 D3.1@61.468,62.865
pads on no net: C1_1.1 C1_1.2 C1_1_1.1 C1_1_1.2 C1_1_2.1 C1_1_2.2 C1_1_3.1 C1_1_3.2 C1_1_4.1 C1_1_4.2 C1_1_5.1 C1_1_5.2 C1_2.1 C1_2.2 C1_2_1.1 C1_2_1.2 C1_2_2.1 C1_2_2.2 C1_2_3.1 C1_2_3.2 C1_2_4.1 C1_2_4.2 C1_2_5.1 C1_2_5.2 C1_3.1 C1_3.2 C1_4.1 C1_4.2 C1_5.1 C1_5.2 C1_6.1 C1_6.2 C1_7.1 C1_7.2 C2_1.1 C2_1.2 C2_1_1.1 C2_1_1.2 C2_1_2.1 C2_1_2.2 C2_1_3.1 C2_1_3.2 C2_1_4.1 C2_1_4.2 C2_1_5.1 C2_1_5.2 C2_2.1 C2_2.2 C2_2_1.1 C2_2_1.2 C2_2_2.1 C2_2_2.2 C2_2_3.1 C2_2_3.2 C2_2_4.1 C2_2_4.2 C2_2_5.1 C2_2_5.2 C2_3.1 C2_3.2 C2_4.1 C2_4.2 C2_5.1 C2_5.2 C2_6.1 C2_6.2 C2_7.1 C2_7.2 D1_1.1 D1_1.2 D1_1_1.1 D1_1_1.2 D1_1_2.1 D1_1_2.2 D1_1_3.1 D1_1_3.2 D1_1_4.1 D1_1_4.2 D1_1_5.1 D1_1_5.2 D1_2.1 D1_2.2 D1_2_1.1 D1_2_1.2 D1_2_2.1 D1_2_2.2 D1_2_3.1 D1_2_3.2 D1_2_4.1 D1_2_4.2 D1_2_5.1 D1_2_5.2 D1_3.1 D1_3.2 D1_4.1 D1_4.2 D1_5.1 D1_5.2 D1_6.1 D1_6.2 D1_7.1 D1_7.2 D2_1.1 D2_1.2 D2_1_1.1 D2_1_1.2 D2_1_2.1 D2_1_2.2 D2_1_3.1 D2_1_3.2 D2_1_4.1 D2_1_4.2 D2_1_5.1 D2_1_5.2 D2_2.1 D2_2.2 D2_2_1.1 D2_2_1.2 D2_2_2.1 D2_2_2.2 D2_2_3.1 D2_2_3.2 D2_2_4.1 D2_2_4.2 D2_2_5.1 D2_2_5.2 D2_3.1 D2_3.2 D2_4.1 D2_4.2 D2_5.1 D2_5.2 D2_6.1 D2_6.2 D2_7.1 D2_7.2 D3_1.1 D3_1.2 D3_1_1.1 D3_1_1.2 D3_1_2.1 D3_1_2.2 D3_1_3.1 D3_1_3.2 D3_1_4.1 D3_1_4.2 D3_1_5.1 D3_1_5.2 D3_2.1 D3_2.2 D3_2_1.1 D3_2_1.2 D3_2_2.1 D3_2_2.2 D3_2_3.1 D3_2_3.2 D3_2_4.1 D3_2_4.2 D3_2_5.1 D3_2_5.2 D3_3.1 D3_3.2 D3_4.1 D3_4.2 D3_5.1 D3_5.2 D3_6.1 D3_6.2 D3_7.1 D3_7.2 P1_1.1 P1_1.2 P1_1_1.1 P1_1_1.2 P1_1_2.1 P1_1_2.2 P1_1_3.1 P1_1_3.2 P1_1_4.1 P1_1_4.2 P1_1_5.1 P1_1_5.2 P1_2.1 P1_2.2 P1_2_1.1 P1_2_1.2 P1_2_2.1 P1_2_2.2 P1_2_3.1 P1_2_3.2 P1_2_4.1 P1_2_4.2 P1_2_5.1 P1_2_5.2 P1_3.1 P1_3.2 P1_4.1 P1_4.2 P1_5.1 P1_5.2 P1_6.1 P1_6.2 P1_7.1 P1_7.2 P2_1.1 P2_1.2 P2_1_1.1 P2_1_1.2 P2_1_2.1 P2_1_2.2 P2_1_3.1 P2_1_3.2 P2_1_4.1 P2_1_4.2 P2_1_5.1 P2_1_5.2 P2_2.1 P2_2.2 P2_2_1.1 P2_2_1.2 P2_2_2.1 P2_2_2.2 P2_2_3.1 P2_2_3.2 P2_2_4.1 P2_2_4.2 P2_2_5.1 P2_2_5.2 P2_3.1 P2_3.2 P2_4.1 P2_4.2 P2_5.1 P2_5.2 P2_6.1 P2_6.2 P2_7.1 P2_7.2 R1_1.1 R1_1.2 R1_1.3 R1_1_1.1 R1_1_1.2 R1_1_1.3 R1_1_2.1 R1_1_2.2 R1_1_2.3 R1_1_3.1 R1_1_3.2 R1_1_3.3 R1_1_4.1 R1_1_4.2 R1_1_4.3 R1_1_5.1 R1_1_5.2 R1_1_5.3 R1_2.1 R1_2.2 R1_2.3 R1_2_1.1 R1_2_1.2 R1_2_1.3 R1_2_2.1 R1_2_2.2 R1_2_2.3 R1_2_3.1 R1_2_3.2 R1_2_3.3 R1_2_4.1 R1_2_4.2 R1_2_4.3 R1_2_5.1 R1_2_5.2 R1_2_5.3 R1_3.1 R1_3.2 R1_3.3 R1_4.1 R1_4.2 R1_4.3 R1_5.1 R1_5.2 R1_5.3 R1_6.1 R1_6.2 R1_6.3 R1_7.1 R1_7.2 R1_7.3 R2_1.1 R2_1.2 R2_1.3 R2_1_1.1 R2_1_1.2 R2_1_1.3 R2_1_2.1 R2_1_2.2 R2_1_2.3 R2_1_3.1 R2_1_3.2 R2_1_3.3 R2_1_4.1 R2_1_4.2 R2_1_4.3 R2_1_5.1 R2_1_5.2 R2_1_5.3 R2_2.1 R2_2.2 R2_2.3 R2_2_1.1 R2_2_1.2 R2_2_1.3 R2_2_2.1 R2_2_2.2 R2_2_2.3 R2_2_3.1 R2_2_3.2 R2_2_3.3 R2_2_4.1 R2_2_4.2 R2_2_4.3 R2_2_5.1 R2_2_5.2 R2_2_5.3 R2_3.1 R2_3.2 R2_3.3 R2_4.1 R2_4.2 R2_4.3 R2_5.1 R2_5.2 R2_5.3 R2_6.1 R2_6.2 R2_6.3 R2_7.1 R2_7.2 R2_7.3 R3_1.1 R3_1.2 R3_1_1.1 R3_1_1.2 R3_1_2.1 R3_1_2.2 R3_1_3.1 R3_1_3.2 R3_1_4.1 R3_1_4.2 R3_1_5.1 R3_1_5.2 R3_2.1 R3_2.2 R3_2_1.1 R3_2_1.2 R3_2_2.1 R3_2_2.2 R3_2_3.1 R3_2_3.2 R3_2_4.1 R3_2_4.2 R3_2_5.1 R3_2_5.2 R3_3.1 R3_3.2 R3_4.1 R3_4.2 R3_5.1 R3_5.2 R3_6.1 R3_6.2 R3_7.1 R3_7.2 R4_1.1 R4_1.2 R4_1_1.1 R4_1_1.2 R4_1_2.1 R4_1_2.2 R4_1_3.1 R4_1_3.2 R4_1_4.1 R4_1_4.2 R4_1_5.1 R4_1_5.2 R4_2.1 R4_2.2 R4_2_1.1 R4_2_1.2 R4_2_2.1 R4_2_2.2 R4_2_3.1 R4_2_3.2 R4_2_4.1 R4_2_4.2 R4_2_5.1 R4_2_5.2 R4_3.1 R4_3.2 R4_4.1 R4_4.2 R4_5.1 R4_5.2 R4_6.1 R4_6.2 R4_7.1 R4_7.2 U1.5 U1_1.1 U1_1.2 U1_1.3 U1_1.4 U1_1.5 U1_1.6 U1_1.7 U1_1.8 U1_1_1.1 U1_1_1.2 U1_1_1.3 U1_1_1.4 U1_1_1.5 U1_1_1.6 U1_1_1.7 U1_1_1.8 U1_1_2.1 U1_1_2.2 U1_1_2.3 U1_1_2.4 U1_1_2.5 U1_1_2.6 U1_1_2.7 U1_1_2.8 U1_1_3.1 U1_1_3.2 U1_1_3.3 U1_1_3.4 U1_1_3.5 U1_1_3.6 U1_1_3.7 U1_1_3.8 U1_1_4.1 U1_1_4.2 U1_1_4.3 U1_1_4.4 U1_1_4.5 U1_1_4.6 U1_1_4.7 U1_1_4.8 U1_1_5.1 U1_1_5.2 U1_1_5.3 U1_1_5.4 U1_1_5.5 U1_1_5.6 U1_1_5.7 U1_1_5.8 U1_2.1 U1_2.2 U1_2.3 U1_2.4 U1_2.5 U1_2.6 U1_2.7 U1_2.8 U1_2_1.1 U1_2_1.2 U1_2_1.3 U1_2_1.4 U1_2_1.5 U1_2_1.6 U1_2_1.7 U1_2_1.8 U1_2_2.1 U1_2_2.2 U1_2_2.3 U1_2_2.4 U1_2_2.5 U1_2_2.6 U1_2_2.7 U1_2_2.8 U1_2_3.1 U1_2_3.2 U1_2_3.3 U1_2_3.4 U1_2_3.5 U1_2_3.6 U1_2_3.7 U1_2_3.8 U1_2_4.1 U1_2_4.2 U1_2_4.3 U1_2_4.4 U1_2_4.5 U1_2_4.6 U1_2_4.7 U1_2_4.8 U1_2_5.1 U1_2_5.2 U1_2_5.3 U1_2_5.4 U1_2_5.5 U1_2_5.6 U1_2_5.7 U1_2_5.8 U1_3.1 U1_3.2 U1_3.3 U1_3.4 U1_3.5 U1_3.6 U1_3.7 U1_3.8 U1_4.1 U1_4.2 U1_4.3 U1_4.4 U1_4.5 U1_4.6 U1_4.7 U1_4.8 U1_5.1 U1_5.2 U1_5.3 U1_5.4 U1_5.5 U1_5.6 U1_5.7 U1_5.8 U1_6.1 U1_6.2 U1_6.3 U1_6.4 U1_6.5 U1_6.6 U1_6.7 U1_6.8 U1_7.1 U1_7.2 U1_7.3 U1_7.4 U1_7.5 U1_7.6 U1_7.7 U1_7.8